# Altium PCB PACUE_V2.PcbDoc
Units mm, origin at the board's own origin, x right, y up, seen from the top; angles counter-clockwise.
Board outline 30 x 111 mm, 2 copper layers (Top Layer, Bottom Layer); 21 components, 24 nets, 110 pads, 22 vias.
Unrouted connection lines stored in the file: 27.
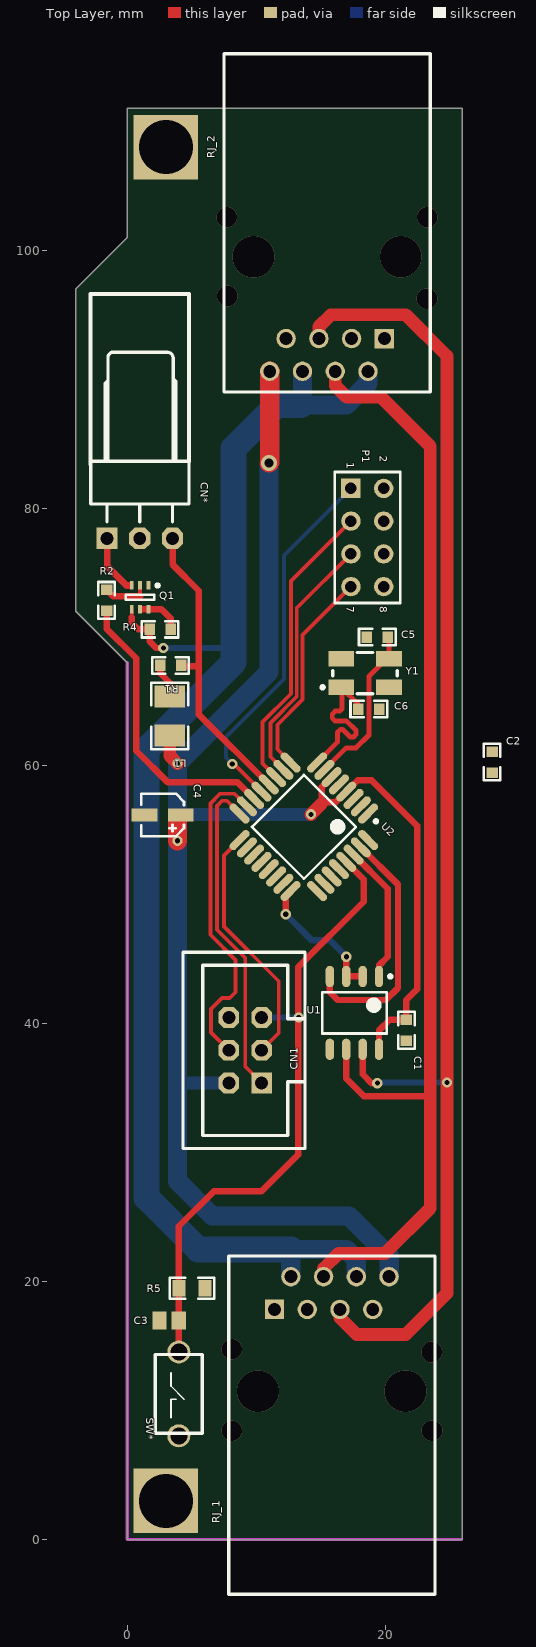
[diagram p0: Top Layer view]
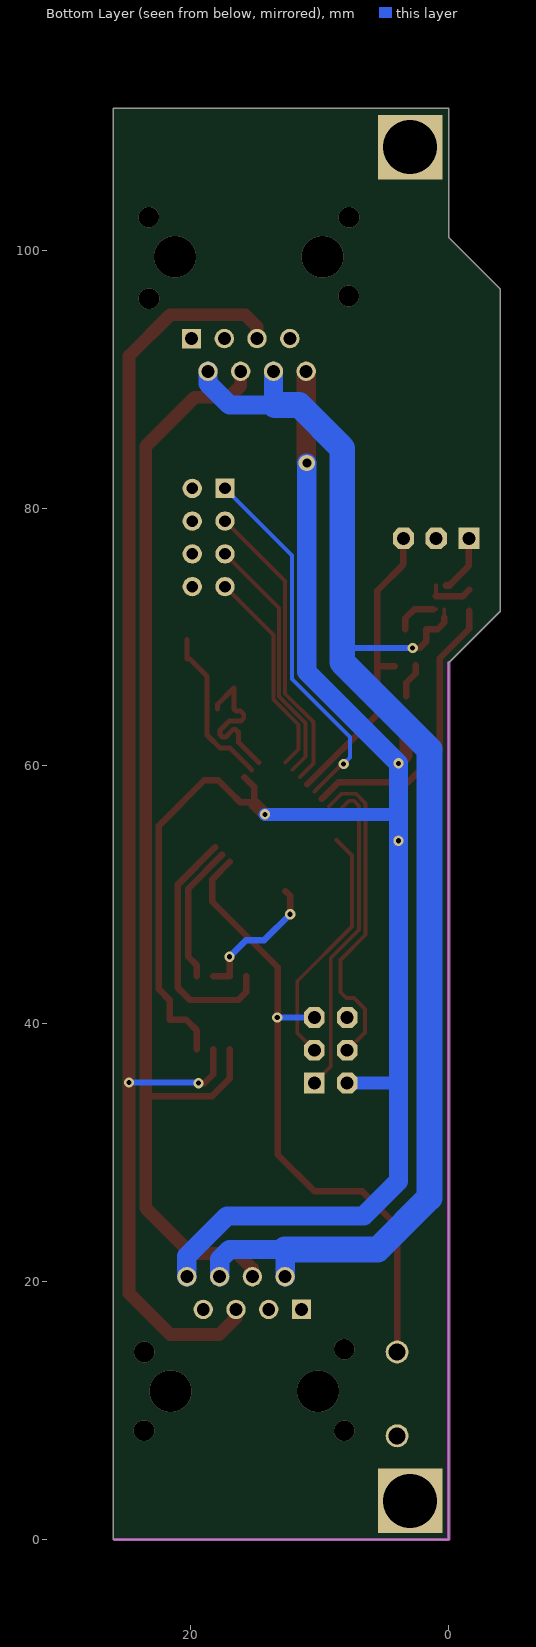
[diagram p1: Bottom Layer view, seen from below]

## Layer stack, top to bottom
Top Solder: solder mask 0.0102, Solder Resist, Dk 3.5
Top Layer: signal copper 0.0356
Dielectric 1: dielectric 0.32, FR-4, Dk 4.8
Bottom Layer: signal copper 0.0356
Bottom Solder: solder mask 0.0102, Solder Resist, Dk 3.5

## Board outline
0,111 26,111 26,0 0,0 0,68 -4,72 -4,97 0,101

## Design rules (kind name [scope] priority, off if disabled: settings)
Clearance [IsRegion] p1: gap=0.25 ignorepadtopadclearanceinfootprint=TRUE
Clearance Clearance_1 [All] p2: gap=0 ignorepadtopadclearanceinfootprint=TRUE
ComponentClearance [All] p1 off: gap=0 collisioncheckmode=3 verticalgap=2540 showdistances=FALSE
DiffPairsRouting [All] p1: maxlimit=0.254 minlimit=0.254 mostfreqgap=0.254 toplayer_minwidth=0.381 toplayer_maxwidth=0.381 toplayer_prefwidth=0.381 bottomlayer_minwidth=0.381 bottomlayer_maxwidth=0.381 bottomlayer_prefwidth=0.381 maxuncoupledlength=12.7
PlaneClearance [All] p1: clearance=0.8
PlaneConnect [All] p1: planeconnectstyle=Relief reliefexpansion=0.6 reliefentries=4 reliefconductorwidth=0.4 reliefairgap=0.254
PolygonConnect [All] p1: connectstyle=Relief reliefconductorwidth=0.4 reliefentries=4 polygonreliefangle="90 Angle" airgapwidth=0.254
RoutingVias [All] p1: holewidth=0.4 width=0.8 viastyle="Through Hole" minholewidth=0.3 minwidth=0.6 maxholewidth=1 maxwidth=2
SolderMaskExpansion [IsVia] p1: expansion=-5
SolderMaskExpansion SolderMaskExpansion_1 [All] p2: expansion=0.102
UnRoutedNet [All] p1: checkbadconnections=TRUE
Width [All] p1: maxlimit=12 minlimit=0.254 preferedwidth=0.254
25 further rules are at their usual default settings.

## Classes and differential pairs
differential pair XTAL: +XTAL_P -XTAL_N

## Components (designator, comment, footprint, x,y, rotation, side; value= is the part's Value field where it differs from the comment)
C1 "100n" C0603 21.65,39.5 r90 top
C2 "100n" C0603 28.3,60.3 r270 top
C3 "Cap" C0805 3.25,17 r0 top value=100nF
C4 "Cap Pol1" CES_A_3.3x3.3_5.4 2.75,56.2 r270 top value=47uF
C5 "22p" C0603 19.4,70 r180 top
C6 "22p" C0603 18.737,64.409 r0 top
CN1 "IDC Connector" IDC6 9.15,37.95 r90 top
CN* "CN_35" PCBComponent_1 1,82 r0 top
L1 "Inductor" L1210 3.3,63.876 r270 top value=100uH
P1 "Header 4X2" HDR2X4 17.35,81.53 r270 top
Q1 "DMG1016UDW" ONSC-SOT-363-6-419B-02_V 1,73.08 r270 top
R1 "1k" R0603 3.363,67.8 r0 top
R2 "200" R0603 -1.6,72.85 r270 top
R4 "1k" R0603 2.55,70.6 r0 top
R5 "1k" R0805 5.016,19.5 r0 top
RJ_1 "RJ_45SE" RJ_45SE 15.865,11.5 r0 top
RJ_2 "RJ_45SE" RJ_45SE 15.5,99.5 r180 top
SW* "DTS32_switch" DTS32 -15.304,21.662 r270 top
U1 "MAX485CSA+" MAXM-MAX485CSA+-8_M 17.623,40.85 r270 top
U2 "ATmega328P-AU" 32A_M 13.7,55.284 r225 top
Y1 "16,00 MHz" 5,0x3,2x0,9mm 18.45,67.2 r0 top

## Footprints (in the part's own frame and the unit in brackets; to place one, negate y for a bottom-side part, rotate by r counter-clockwise, add the part's x,y. Pads: shape width x height; smd on the part's side, far side on the other; paste and mask are expansions set on the pad)
5,0x3,2x0,9mm [mm] "Quartz Crystal, SMD; Body 5,0 x 3,2 mm (LxW max), e.g. Farnell 1842001"
  rect 2x1.2 smd: 1(-1.85,-1.1) 2(1.85,-1.1) 3(1.85,1.1) 4(-1.85,1.1)
  silkscreen extent -3.42,-1.6 2.5,1.6, body extent -2.5,-1.6 2.5,1.6, height 1.01
32A_M [mm] "Thin QFP, 32-Leads, Body 7x7mm, Pitch 0.8mm, IPC Low Density"
  oval 1.95x0.6 smd: 1(-4.25,2.8) 2(-4.25,2) 3(-4.25,1.2) 4(-4.25,0.4) 5(-4.25,-0.4) 6(-4.25,-1.2) 7(-4.25,-2) 8(-4.25,-2.8) 17(4.25,-2.8) 18(4.25,-2) 19(4.25,-1.2) 20(4.25,-0.4) 21(4.25,0.4) 22(4.25,1.2) 23(4.25,2) 24(4.25,2.8)
  oval 0.6x1.95 smd: 9(-2.8,-4.25) 10(-2,-4.25) 11(-1.2,-4.25) 12(-0.4,-4.25) 13(0.4,-4.25) 14(1.2,-4.25) 15(2,-4.25) 16(2.8,-4.25) 25(2.8,4.25) 26(2,4.25) 27(1.2,4.25) 28(0.4,4.25) 29(-0.4,4.25) 30(-1.2,4.25) 31(-2,4.25) 32(-2.8,4.25)
  silkscreen extent -4.37,-2.85 2.85,3.77, body extent -3.5,-3.5 3.5,3.5, height 1.2
C0603 [mil]
  rect 32x35 smd: 1(32,0) 2(-32,0)
  silkscreen extent -56,-25 56,25, body extent -31,-16 32,16, height 12
C0805 [mm] "Chip Capacitor, Body 2.0x1.3mm, IPC High Density"
  rect 1.1x1.4 smd: 1(-0.75,0) 2(0.75,0)
  body extent -1.1,-0.72 1.1,0.72, height 1.4
CES_A_3.3x3.3_5.4 [mm] "Electrolit Capacitor A Size; base: 3.3x3.3mm, height: 5.4mm"
  rect 1x2 smd: 1(0,1.4) 2(0,-1.4)
  silkscreen extent -1.65,-1.65 1.65,1.65, body extent -1.65,-1.8 1.65,1.8, height 5.4
DTS32 [mil]
  round 70 hole 52: 1(280,760) 2(536,760)
  silkscreen extent 288,688 528,832
HDR2X4 [mm] "Connector; Header; 4x2 Position"
  rect 1.5x1.5 hole 0.9: 1(0,0)
  round 1.5 hole 0.9: 2(0,2.54) 3(2.54,0) 4(2.54,2.54) 5(5.08,0) 6(5.08,2.54) 7(7.62,0) 8(7.62,2.54)
  silkscreen extent -1.27,-1.27 8.89,3.81
IDC6 [mm] "2.54mm, 6 Pin IDC Male Connector"
  rect 1.6x1.6 hole 1: 1(-2.54,-1.27)
  oct 1.6x1.6 hole 1: 2(-2.54,1.27) 3(0,-1.27) 4(0,1.27) 5(2.54,-1.27) 6(2.54,1.27)
  silkscreen extent -7.62,-4.64 7.61,4.83, body extent -7.62,-4.57 7.62,4.7, height 9.29
L1210 [mm] "Molded Inductor 3,2x2,5x2,4mm (EIA1210)"
  rect 1.7x2.4 smd: 1(-1.524,0) 2(1.524,0)
  silkscreen extent -2.59,-1.42 2.59,1.42, body extent -1.79,-1.35 1.79,1.35, height 2.4
MAXM-MAX485CSA+-8_M [mm] "SOIC, 8-Leads, Body 5x4mm, Pitch 1.27mm, IPC Low Density"
  oval 1.65x0.65 smd: 1(-2.825,1.905) 2(-2.825,0.635) 3(-2.825,-0.635) 4(-2.825,-1.905) 5(2.825,-1.905) 6(2.825,-0.635) 7(2.825,0.635) 8(2.825,1.905)
  silkscreen extent -2.95,-2.5 1.6,2.91, body extent -2,-2.5 2,2.5, height 1.75
ONSC-SOT-363-6-419B-02_V [mm] "SOT23, 6-Leads, Body 2x1.25mm, Pitch 0.65mm"
  rect 0.66x0.3 smd: 1(-0.92,0.65) 2(-0.92,0) 3(-0.92,-0.65) 4(0.92,-0.65) 5(0.92,0) 6(0.92,0.65)
  silkscreen extent -1.04,-1.1 0.19,1.48, body extent -0.63,-1 0.63,1, height 1.1
PCBComponent_1 [mm]
  rect 1.65x1.65 hole 1: 1(-2.565,-4.343)
  oct 1.65x1.65 hole 1: 2(-0.025,-4.343) 3(2.515,-4.343)
  silkscreen extent -3.84,-3.07 3.78,14.6
R0603 [mil]
  rect 32x35 smd: 1(32,0) 2(-32,0)
  silkscreen extent -56,-25 56,25, body extent -31,-16 32,16, height 12
R0805 [mil]
  rect 40x50 smd: 1(-40,0) 2(40,0)
  silkscreen extent -68,-32 68,32, body extent -39,-25 39,25, height 31
RJ_45SE [mm]
  rect 1.5x1.5 hole 1: 1(-4.445,6.35)
  round 1.5 hole 1: 2(-3.175,8.89) 3(-1.905,6.35) 4(-0.634,8.89) 5(0.635,6.35) 6(1.905,8.89) 7(3.175,6.35) 8(4.445,8.89)
  silkscreen extent -8,-15.75 8,10.5, body extent -8,-15.75 8,10.5, height 13.64

## Part data
C1 C2 C5 C6: library part Cap, "Capacitor", ComponentLink1Description=datasheet, ComponentLink2Description=supplier
C3: "Capacitor", LatestRevisionDate=17-Jul-2002, LatestRevisionNote="Re-released for DXP Platform.", PackageDescription="Radial Cap, Thru-Hole; 2 Leads; 0.3 in Pin Spacing", PackageReference=RAD-0.3, Published=8-Jun-2000, Publisher="Altium Limited"
C4: "Polarized Capacitor (Radial)", LatestRevisionDate=17-Jul-2002, LatestRevisionNote="Re-released for DXP Platform.", PackageDescription="Polarized Capacitor (Radial); 2 Leads", PackageReference=RB7.6-15, Published=8-Jun-2000, Publisher="Altium Limited"
CN1: library part CN_3x2
P1: "Header, 4-Pin, Dual row", LatestRevisionDate=17-Jul-2002, LatestRevisionNote="Re-released for DXP Platform.", Publisher="Altium Limited"
Q1: library part CMP-1048-00846-1, "Dual General Purpose Transistors, NPN / PNP (Complementary), 6-Pin SOT-363, Pb-Free, Tape and Reel", Manufacturer="On Semiconductor", PartNumber=BC847BPDW1T1G, ComponentLink1Description="Manufacturer URL", ComponentLink1URL=http://www.onsemi.com/, ComponentLink2Description=Datasheet, ComponentLink2URL=http://www.onsemi.cn/pub_link/Collateral/BC846BPDW1T1-D.PDF, ComponentLink3Description="Package Specification", ComponentLink3URL=http://www.onsemi.cn/pub_link/Collateral/419B-02.PDF, DatasheetVersion="Rev. 9", fT Min (MHz)=100, IC Continuous (A)=0.1, Mounting Technology="Surface Mount", PackageDescription="6-Pin Small Outline Transistor, Body 2 x 1.25 mm, Pitch 0.65 mm", PackageReference=SOT-363-6-419B-02, PackageVersion="Rev. Y, 12/2012", Packing="Tape and Reel", Polarity=Complementary, RoHS=TRUE
R1 R2 R4 R5: library part Res, "Resistor", ComponentLink1Description=datasheet, ComponentLink2Description=supplier, Published=19-Feb-2006
U1: library part CMP-2000-05211-1, "Low-Power, Slew-Rate-Limited RS-485/RS-422 Transceiver, 4.75 to 5.25 V, 0 to 70 degC, 8-Pin SOIC, RoHS, Tape and Reel", Digital IC Case Style=SOIC, IC Temperature Range=Commercial, Manufacturer=Maxim, Operating Temperature Max=70degC, Operating Temperature Min=0degC, Operating Temperature Range=0degCto+70degC, Supply Current=500µA, Supply Voltage Max=5.25V, Supply Voltage Min=4.75V, Supply Voltage Range=4.75Vto5.25V, Base Number=485, Data Rate=2.5Mbps, Datasheet URL=https://datasheet.ciiva.com/29306/170071-da-01-en-ic-max485csa-so8-29306144.pdf, Datasheet Version="Rev. 8, 10/2003", Device Marking=MAX485CSA+, Device Type=Transceiver, Driver Case Style=SOIC, IC Generic Number=485, Interface=RS-422/RS-485, Interface Type=RS422,RS485, Line / Bus Driver / Receiver / Transceiver Type=CMOSDifferential, Logic Function Number=485, Manufacturer URL=http://www.maximintegrated.com/, No. of Drivers=1, No. of Pins=8, No. of Receivers=1, Package / Case=SOIC, Transceiver Type=Differential
U2: library part CMP-0095-00269-2, "8-bit AVR Microcontroller, 32KB Flash, 1KB EEPROM, 2KB SRAM, 32-pin TQFP, Industrial Grade (-40°C to 85°C)", Code_JEDEC=MS-026-ABA, ComponentLink1Description="Manufacturer URL", ComponentLink1URL=http://www.atmel.com/, ComponentLink2Description="ATmega48A/48PA/88A/88PA/168A/168PA/328/328P Datasheet", ComponentLink2URL=http://www.atmel.com/dyn/resources/prod_documents/doc8271.pdf, ComponentLink3Description="ATmega48A/48PA/88A/88PA/168A/168PA/328/328P Summary", ComponentLink3URL=http://www.atmel.com/dyn/resources/prod_documents/8271S.pdf, DatasheetVersion="revD, May-2011", PackageDescription="32-Lead, 7x7x1.0 mm Body, 0.8mm Lead Pitch, Thin Profile Plastic Quad Flat Package (TQFP)", PackageReference=32A, PackageVersion="revC, Oct-2010", RevisionNote="DatasheetVersion & PackageVersion updated. URLs added."
Y1: library part CFPX180-16.0M, "16,000MHz (+/- 30ppm), 3.2 x 2.5mm SMD Crystal", Supplier Part Number 1=16.00M-CFPX180, Supplier 1=TME
L1: Code_IEC=1005, Code_JEITA=0402, LatestRevisionDate=29-May-2009, LatestRevisionNote="IPC-7351 Footprint Added.", PackageDescription="Chip Inductor", PackageReference=0402-A, Published=8-Jun-2000, Publisher="Altium Limited"

## Free pads (board coordinates)
  rect 5x5 hole 4.2: 0(3,3) 1(3,108)
  round 0.8 hole 0.4: 2(3.9,54.2)

## Via types
v1: diameter 0.8, hole 0.4, Top Layer to Bottom Layer, 9 vias
v2: diameter 1.6, hole 1.6, Top Layer to Bottom Layer, 8 vias
v3: diameter 3.25, hole 3.25, Top Layer to Bottom Layer, 4 vias
v4: diameter 1.27, hole 0.711, Top Layer to Bottom Layer, 1 vias

## Nets (pads, with @x,y where several pads share a name; then routed paths per layer and width w, separated by ;. In a path a pad name is that pad's centre, name@x,y a point inside that pad or via, vN(x,y) a via of type N, cw(c..) or ccw(c..) an arc to the next point about the centre after c; other vN are vias at no path point)
+5: C1.1 C2.1 C4.1 CN1.2 L1.2 pad.2 R5.2 RJ_1.8 RJ_2.8 U1.8 U2.4 U2.6 | length 137
  Top Layer w0.5: 15.05,57.05 15.1,57.1 ; U2.6 15.1,58.381 15.1,57.1 ; U1.8 19.528,39.478 20.363,40.313 C1.1 21.65,41.85 22.5,42.7 22.5,55.35 18.95,58.9 17.882,58.9 U2.4 16.182,57.2 15.2,57.2 15.1,57.1
  Top Layer w1: L1.2 3.3,60.8 v1(3.9,60.2) ; v1(14.25,56.25) 15.05,57.05
  Top Layer w1.5: pad.2 C4.1@3.9,55.842 ; v4(11,83.5) 11.045,83.545 11.045,90.6 RJ_2.8
  Bottom Layer w1: 3.9,35.4 3.91,35.41 CN1.2 ; 3.9,56.25 v1(14.25,56.25)
  Bottom Layer w1.5: v4(11,83.5) 11,67.3 v1(3.9,60.2) 3.9,56.25 pad.2 3.9,35.4 3.9,27.8 6.6,25.1 17.2,25.1 20.31,21.99 RJ_1.8
+12: Q1.4 R4.2 RJ_1.2 RJ_1.6 RJ_2.2 RJ_2.6 | length 108.4
  Top Layer w0.3: 0.35,71.55 Q1.4
  Top Layer w0.5: 0.35,71.55 0.35,71.1 0.85,70.6 R4.2 1.737,69.663 2.25,69.15 v1(2.8,69.15)
  Bottom Layer w0.5: v1(2.8,69.15) 7.85,69.15 8.25,68.75
  Bottom Layer w1.5: RJ_1.2 12.69,21.73 ; 12.7,22.5 17,22.5 17.77,21.73 RJ_1.6 ; RJ_2.6 13.595,88.095 13.5,88 17,88 18.675,89.675 RJ_2.2
  Bottom Layer w2: 12.7,22.5 5.5,22.5 1.5,26.5 1.5,61.3 8.25,68.05 8.25,68.75 8.25,84.65 11.6,88 13.5,88
AD0: P1.1 U2.13 | length 28.8
  Top Layer w0.3: v1(8.15,60.15) 8.268,60.15 U2.13
  Bottom Layer w0.3: v1(8.15,60.15) 7.65,60.65 7.65,62.25 12.15,66.75 12.15,76.33 P1.1
AD1: P1.3 U2.11 | length 23.1
  Top Layer w0.3: U2.11 10.5,60.181 10.5,63.4 12.7,65.6 12.7,74.34 P1.3
AD2: P1.5 U2.10 | length 19.8
  Top Layer w0.3: U2.10 11.1,60.712 11.1,63.325 13.15,65.375 13.15,72.25 P1.5
AD3: P1.7 U2.9 | length 16.4
  Top Layer w0.3: U2.9 11.65,61.294 11.65,63.2 13.6,65.15 13.6,70.16 P1.7
DI: U1.4 U2.31 | length 19.2
  Top Layer w0.5: U1.4 15.718,42.45 16.318,41.85 20.063,41.85 21,42.787 21,50.812 U2.31
DIR: U1.2 U1.3 U2.24 | length 10.8
  Top Layer w0.5: v1(12.3,48.5) 12.3,49.924 U2.24 ; v1(17,45.2) 17,43.687 U1.3 U1.2
  Bottom Layer w0.5: v1(12.3,48.5) 14.3,46.5 15.7,46.5 v1(17,45.2)
FB: CN*.3 R1.1 U2.12 | length 23.6
  Top Layer w0.5: CN*.3 3.515,75.635 5.55,73.6 5.55,67.75 ; R1.1@4.176,67.75 5.55,67.75 ; U2.12 5.55,64 5.55,67.75
GND: C1.2 C2.2 C3.1 C4.2 C5.1 C6.1 CN1.6 CN*.2 P1.2 P1.4 P1.6 P1.8 Q1.1 RJ_1.1 RJ_1.3 RJ_1.7 RJ_2.1 RJ_2.3 RJ_2.7 SW*.2 U1.5 U2.3 U2.5 U2.21 Y1.2 Y1.4
MISO: CN1.1 U2.16 | length 25.3
  Top Layer w0.3: U2.16 7.724,57.3 7.35,57.3 6.95,56.9 6.95,47.3 9.15,45.1 9.15,36.68 CN1.1
MOSI: CN1.4 U2.15 | length 25.2
  Top Layer w0.3: CN1.4 6.5,39.33 6.5,41.15 7.35,42 7.95,42 8.4,42.45 8.4,44.955 6.45,46.905 6.45,57.1 7.2,57.85 8.305,57.85 U2.15
NetCN*_1: CN*.1 Q1.3 | length 4.7
  Top Layer w0.3: 0.2,74 Q1.3
  Top Layer w0.5: CN*.1 -1.565,75.515 -0.05,74
  Top Layer w0.54: -0.05,74 0.2,74
NetL1_1: L1.1 R1.2 | length 2.7
  Top Layer w0.5: R1.2 2.55,67.2 3.3,66.45 L1.1
NetQ1_2: Q1.2 R2.2 | length 3.7
  Top Layer w0.3: 1,73.15 Q1.2
  Top Layer w0.5: R2.2 -1.087,73.15 1,73.15
NetQ1_5: Q1.5 Q1.6 R4.1 | length 3.5
  Top Layer w0.3: Q1.5 1.2,72.16
  Top Layer w0.5: 1.2,72.16 Q1.6 2.653,72.16 3.363,71.45 R4.1
PWM: R2.1 U2.14 | length 22.5
  Top Layer w0.5: R2.1 -1.6,70.65 0.7,68.35 0.7,61.181 3.131,58.75 8.537,58.75 U2.14
Reset: C3.2 CN1.5 R5.1 SW*.1 U2.29 | length 49.6
  Top Layer w0.5: SW*.1 C3.2 R5.1 4,24.3 6.7,27 10.4,27 13.25,29.85 13.25,44.378 18.35,49.478 18.35,51.2 U2.29
  Bottom Layer w0.5: CN1.5 v1(13.3,40.49)
RO: U1.1 U2.30 | length 10.8
  Top Layer w0.5: U2.30 20.213,50.468 20.213,45.213 19.528,44.528 U1.1
RS485_A: RJ_1.4 RJ_2.4 U1.6 | length 89.7
  Top Layer w0.5: U1.6 16.988,35.762 18.35,34.4 23.5,34.4
  Top Layer w1: RJ_1.4 15.231,21.031 16.4,22.2 20,22.2 23.5,25.7 23.5,34.4 23.5,84.8 19.7,88.6 17.034,88.6 16.134,89.5 RJ_2.4
RS485_B: RJ_1.5 RJ_2.5 U1.7 | length 104.9
  Top Layer w0.5: U1.7 18.258,36.092 18.95,35.4 v1(19.4,35.4)
  Top Layer w1: RJ_2.5 14.865,94.065 15.8,95 21.6,95 24.8,91.8 24.8,19.1 21.6,15.9 17.8,15.9 16.5,17.2 RJ_1.5
  Bottom Layer w0.5: v1(19.4,35.4) 19.45,35.45 v1(24.8,35.45)
SCK: CN1.3 U2.17 | length 19.1
  Top Layer w0.3: U2.17 7.5,53.044 7.5,47.55 11.75,43.3 11.75,39.28 CN1.3
XTAL_N: C6.2 U2.8 Y1.1 | length 12.5
  Top Layer w0.381: U2.8 16.3,61.844 16.3,62.6 16.55,62.85 16.7,62.85 17.3,62.25 17.55,62.25 17.75,62.45 17.75,62.75 17,63.5 16.1,63.5 15.9,63.7 15.9,64.019 16.131,64.25 16.491,64.25 16.65,64.409 16.65,66.05 17.924,64.776 C6.2
XTAL_P: C5.2 U2.7 Y1.3 | length 12.6
  Top Layer w0.381: U2.7 16.988,61.4 17.748,61.4 18.71,62.362 18.75,62.362 18.75,66.95 Y1.3@20.1,68.3 ; Y1.3 C5.2@20.3,69.813
pads on no net: U2.1 U2.2 U2.18 U2.19 U2.20 U2.22 U2.23 U2.25 U2.26 U2.27 U2.28 U2.32
copper on no net:
  other v2: 8.095,8.45 23.635,8.45 23.615,14.55 8.115,14.75 23.25,96.25 7.75,96.45 7.73,102.55 23.27,102.55
  other v3: 10.15,11.5 21.58,11.5 9.785,99.5 21.215,99.5

## Polygon pours and split planes (outlines as drawn)
GND on Top Layer "GND_BOTTOM" (solid, remove dead copper, pour order 2): 1.9,56.5

## Keep-outs
Keep-Out Layer:
  lines w0.254: 0,68 0,0 25.9,0

## Other copper
Top Layer:
  region net AD2: 17.5,38.6

## Silkscreen, mask and mechanical layers (free items; w line width, h text height)
Mechanical 13:
  lines w0.254: 0,68 -4,72 -4,76 -4,86 -4,97 0,101 ; 25.9,0 25.9,111 0,111 0,101 ; 0,101 0,101

## Text inside footprints (layer, text, board x,y; h text height)
P1: Top Overlay "8" at 19.382,72.386 h1 r270; Top Overlay "7" at 16.842,72.386 h1 r270; Top Overlay "1" at 16.842,83.562 h1 r270; Top Overlay "2" at 19.382,84.07 h1 r270